# Altium PCB ver060.PcbDoc (part 1 of 2)
Units mm, origin at the board's own origin, x right, y up, seen from the top; angles counter-clockwise.
Board outline 100 x 49.5 mm, 4 copper layers (ASIG, GND1, GND2, PWR/DSIG), stack 1.569 mm thick; 117 components, 72 nets, 379 pads, 822 vias.
Unrouted connection lines stored in the file: 69.
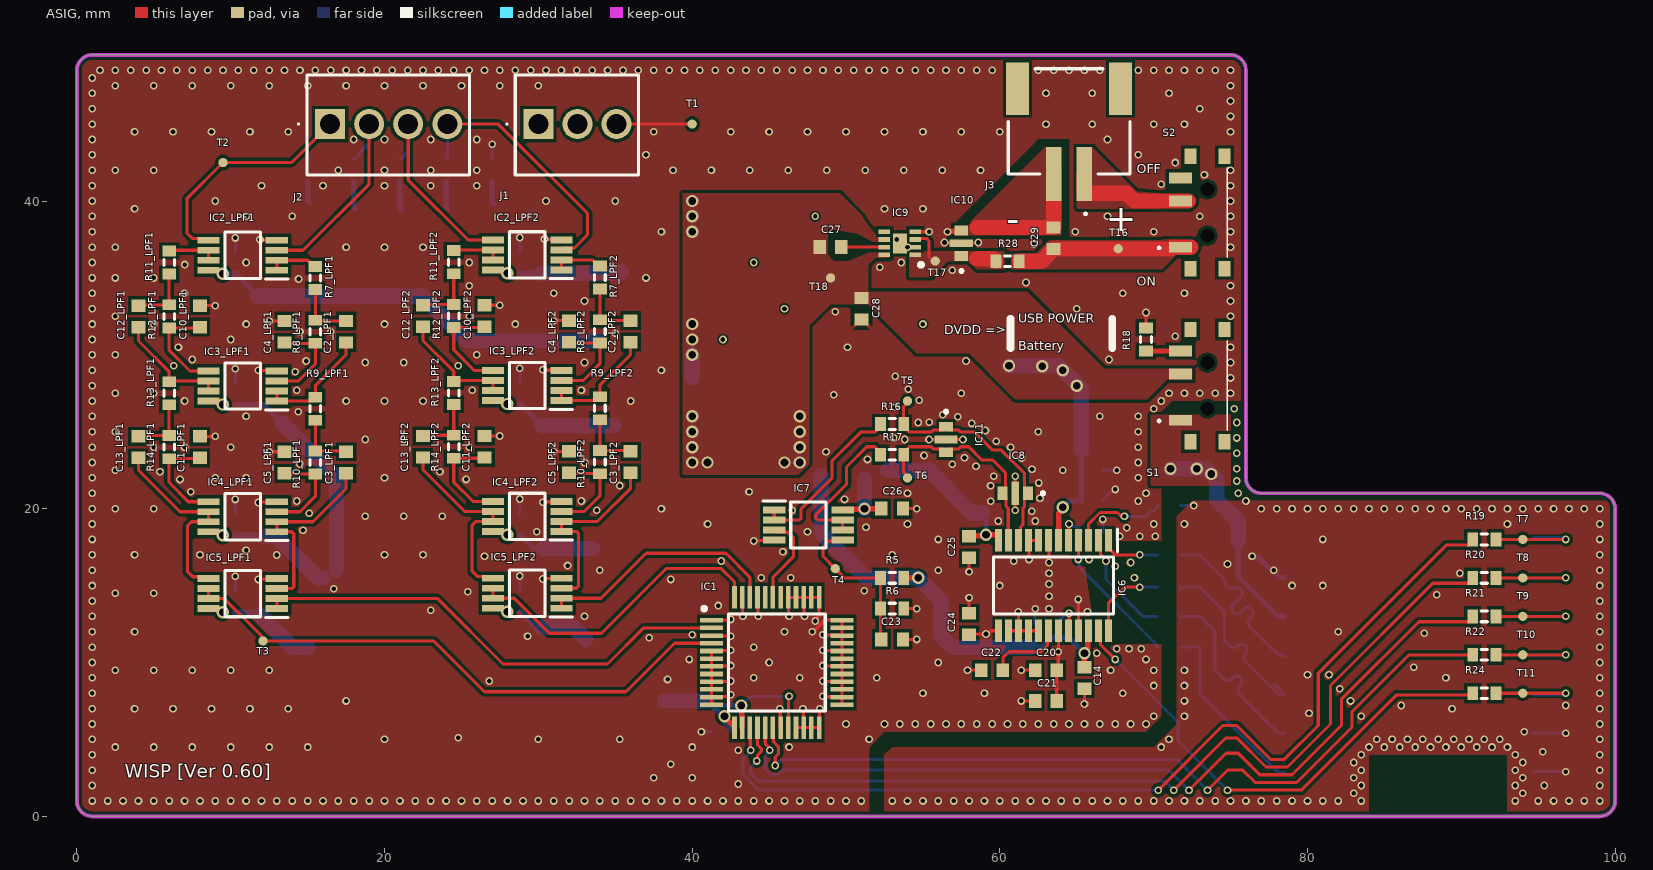
[diagram p0: ASIG view]
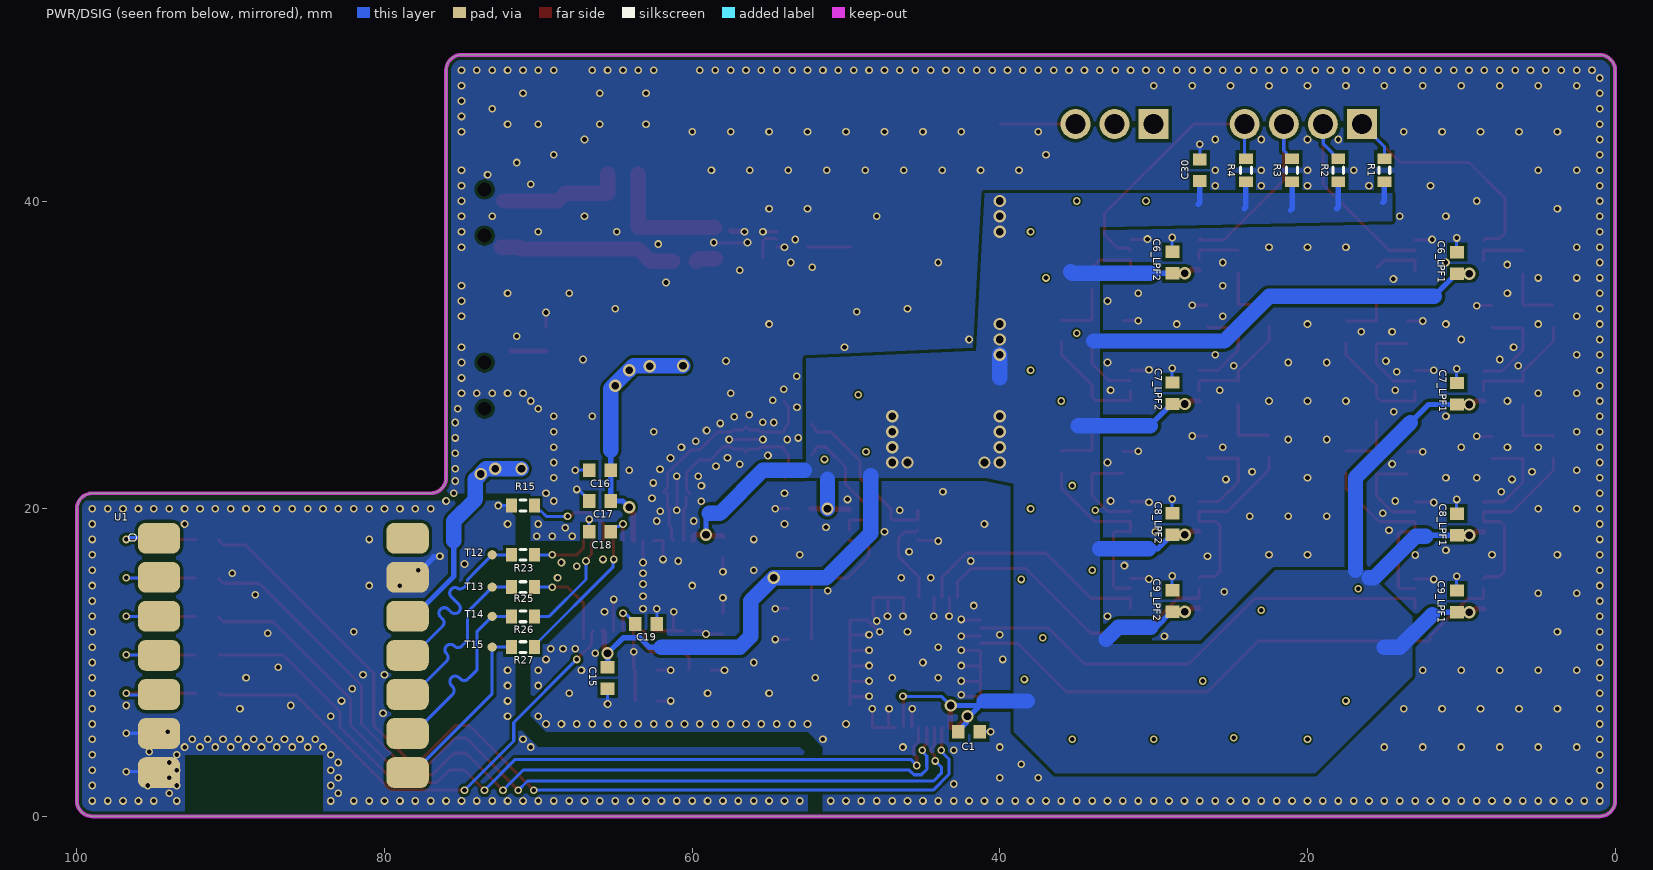
[diagram p1: PWR/DSIG view, seen from below]
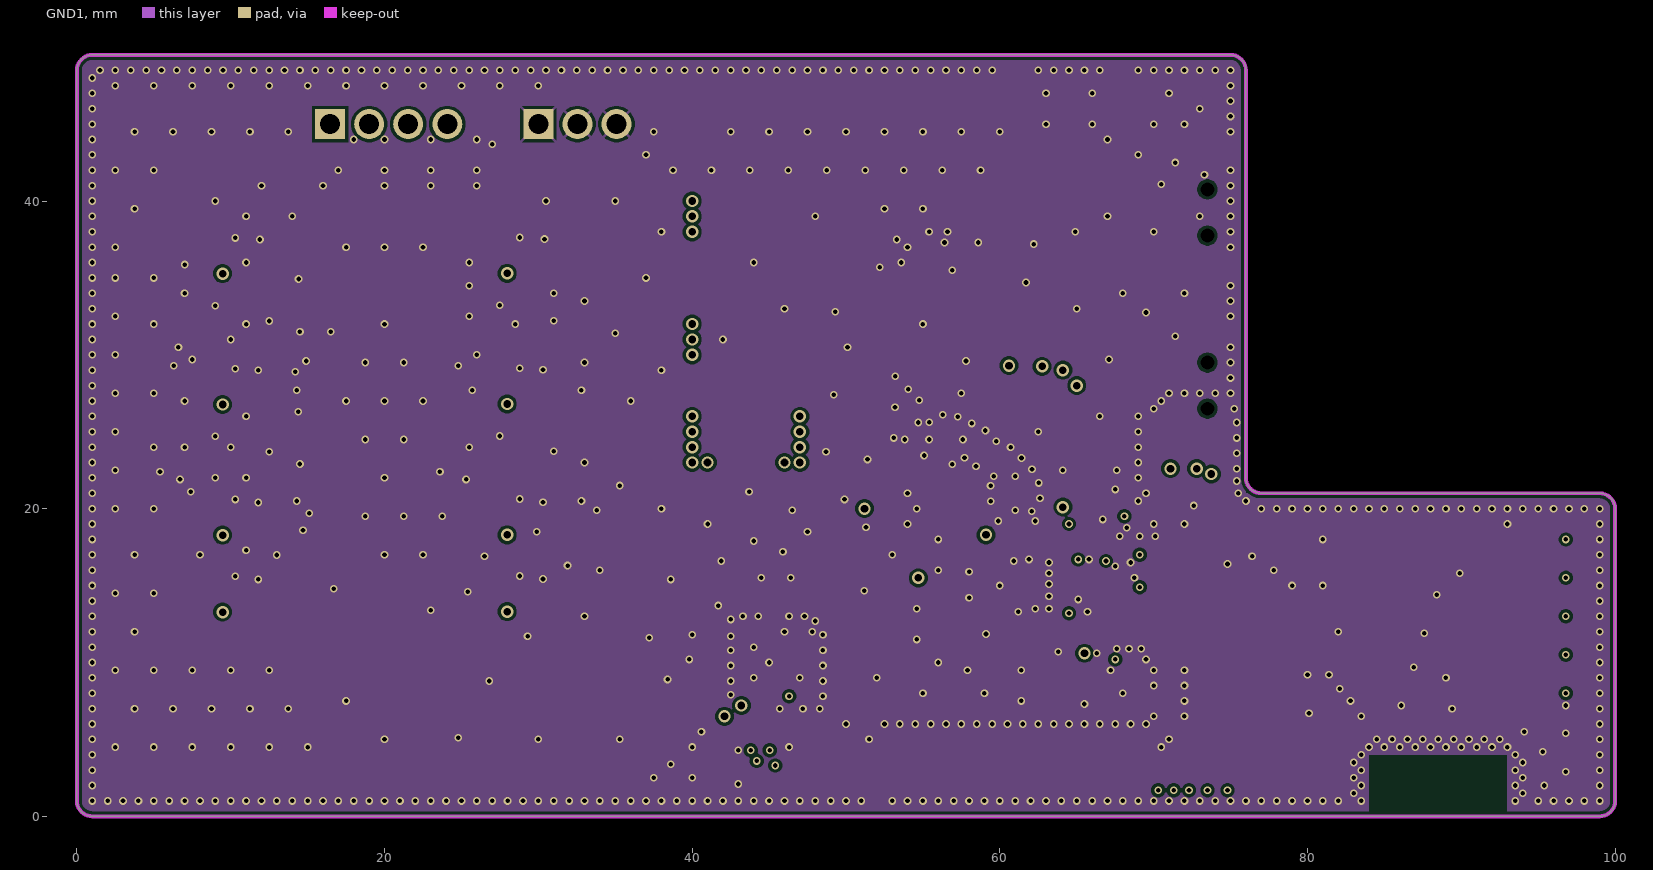
[diagram p2: GND1]
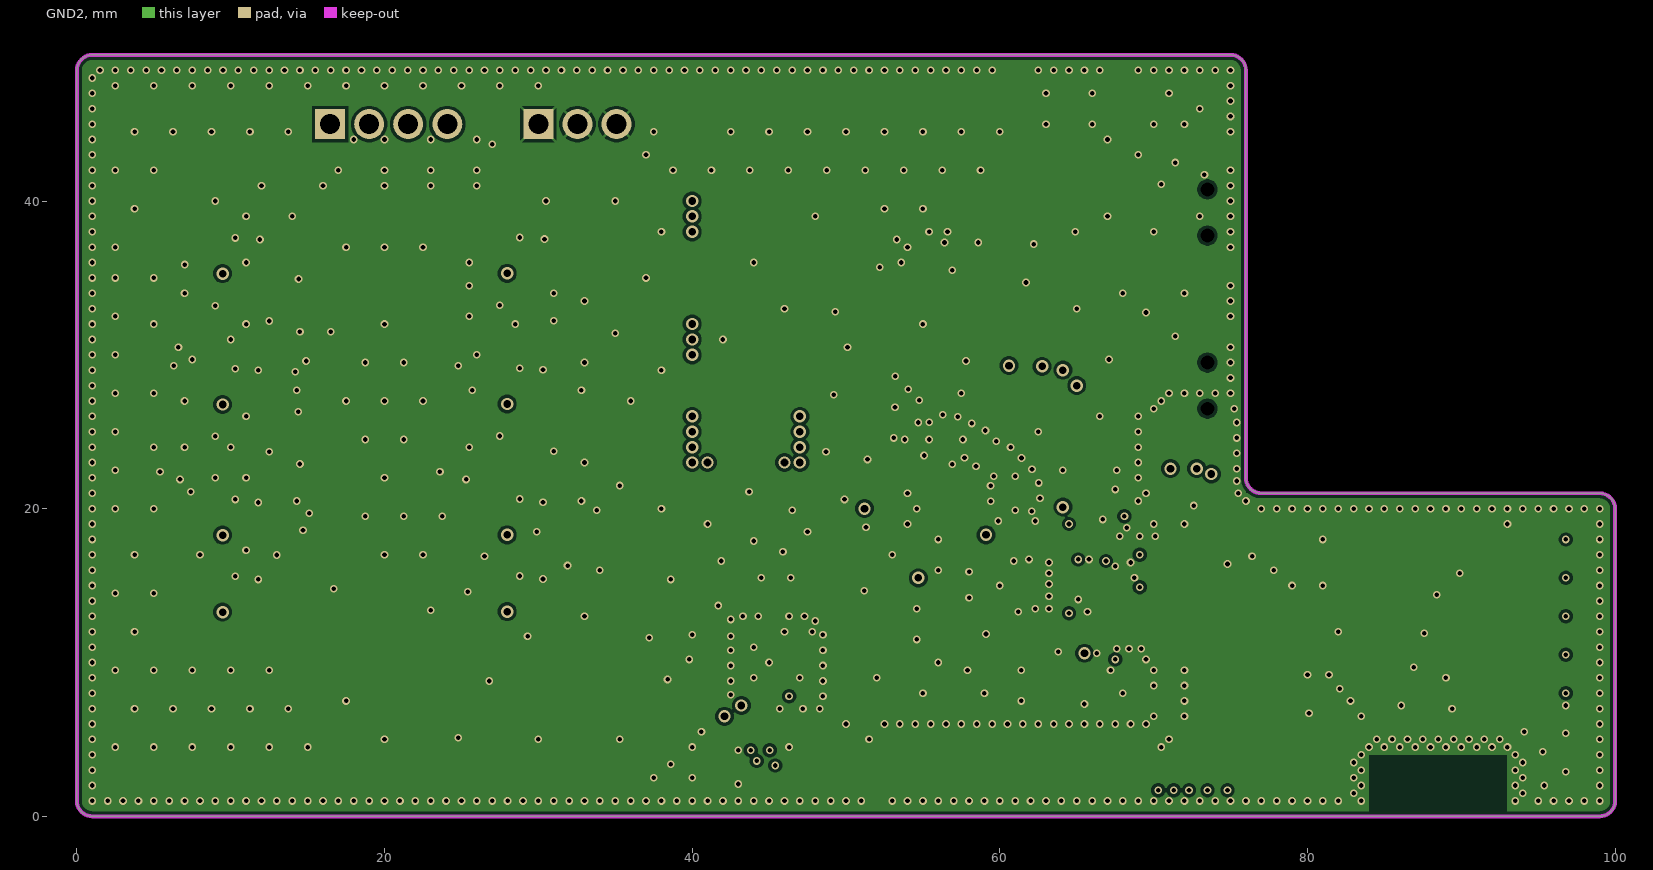
[diagram p3: GND2]

## Layer stack, top to bottom
Top Solder: solder mask 0.02, Solder Resist, Dk 3.8
ASIG: signal copper 0.035
Dielectric 2: prepreg 0.0994, JLC3313, Dk 4.05
GND1: signal copper 0.0175
Dielectric 1: dielectric 1.265, CORE, Dk 4.6
GND2: signal copper 0.0175
Dielectric 3: prepreg 0.0994, JLC3313, Dk 4.05
PWR/DSIG: signal copper 0.035
Bottom Solder: solder mask 0.02, Solder Resist, Dk 3.8

## Board outline
0,1 0,48.5 cw(c1,48.5) 1,49.5 75,49.5 cw(c75,48.5) 76,48.5 76,22 ccw(c77,22) 77,21 99,21 cw(c99,20) 100,20 100,1 cw(c99,1) 99,0 1,0 cw(c1,1)

## Design rules (kind name [scope] priority, off if disabled: settings)
Clearance Clearance_4 [InNamedPolygon('3V3_L01_P018')] p1: gap=0.254 ignorepadtopadclearanceinfootprint=TRUE except(0: Arc-Hole Track-Hole SMDPad-Hole THPad-Hole Via-Hole Fill-Hole Poly-Hole Region-Hole Text-Hole; 0.1: Arc-SMDPad Track-SMDPad SMDPad-SMDPad)
Clearance Clearance_3 [IsVia and InNet('GND')] p2: gap=0.1 ignorepadtopadclearanceinfootprint=TRUE except(0.01: Arc-Text Track-Text SMDPad-Text THPad-Text Via-Text Fill-Text Poly-Text Region-Text Text-Text)
Clearance Clearance_2 [OnLayer('PWR/DSIG') vs HasFootprint('SON50P200X200X80-9N-D')] p3: gap=0.1 ignorepadtopadclearanceinfootprint=TRUE
Clearance Clearance_1 [InNet('AVCC_3V3_raw')] p4: gap=0.2 ignorepadtopadclearanceinfootprint=TRUE except(0.5: Arc-Fill Arc-Poly Arc-Region Track-Fill Track-Poly Track-Region SMDPad-Fill SMDPad-Poly SMDPad-Region THPad-THPad THPad-Fill THPad-Poly THPad-Region Via-Via Via-Fill Via-Poly Via-Region Fill-Fill Fill-Poly Fill-Region Poly-Poly Poly-Region Region-Region)
Clearance [All] p5: gap=0.2 ignorepadtopadclearanceinfootprint=TRUE except(0.01: Arc-Text Track-Text SMDPad-Text THPad-Text Via-Text Fill-Text Poly-Text Region-Text Text-Text)
DiffPairsRouting [All] p1: maxlimit=2.5 minlimit=0.1 mostfreqgap=0.75 toplayer_minwidth=0.2 toplayer_maxwidth=0.5 toplayer_prefwidth=0.25 midlayer1_minwidth=0.2 midlayer1_maxwidth=0.5 midlayer1_prefwidth=0.25 midlayer2_minwidth=0.2 midlayer2_maxwidth=0.5 midlayer2_prefwidth=0.25 bottomlayer_minwidth=0.2 bottomlayer_maxwidth=0.5 bottomlayer_prefwidth=0.25 maxuncoupledlength=12.7
HoleSize [All] p1: absolutevalues=TRUE maxlimit=3.5 minlimit=0.3 maxpercent=80.000 minpercent=20.000
MinimumSolderMaskSliver [All] p1: minsoldermaskwidth=0.01
PlaneConnect [All] p1: planeconnectstyle=Direct reliefexpansion=0.5 reliefentries=4 reliefconductorwidth=0.35 reliefairgap=0.2
PolygonConnect PolygonConnect_8 [IsVia and InNet('GND') vs IsNamedPolygon('GND_L01_P025') or IsNamedPolygon('GND_L04_P026') or IsNamedPolygon('GND_L04_P027') or IsNamedPolygon('GND_L01_P024')] p1: connectstyle=Direct reliefconductorwidth=0.254 reliefentries=4 polygonreliefangle="90 Angle" airgapwidth=0.254
PolygonConnect PolygonConnect_7 [IsPad and InNet('GND') vs IsNamedPolygon('GND_L04_P026')] p2: thpad.connectstyle=Relief thpad.reliefconductorwidth=0.254 thpad.reliefentries=4 thpad.polygonreliefangle="90 Angle" thpad.airgapwidth=0.254 smdpad.connectstyle=Direct smdpad.reliefconductorwidth=0.254 smdpad.reliefentries=4 smdpad.polygonreliefangle="90 Angle" smdpad.airgapwidth=0.254 via.connectstyle=NoConnect via.reliefconductorwidth=0.254 via.reliefentries=4 via.polygonreliefangle="90 Angle" via.airgapwidth=0.254
PolygonConnect PolygonConnect_6 [InComponent('C28') vs InNet('GND')] p3: connectstyle=Relief reliefconductorwidth=0.254 reliefentries=4 polygonreliefangle="45 Angle" airgapwidth=0.254
PolygonConnect PolygonConnect_5 [All vs IsNamedPolygon('GND_L04_P027')] p4: connectstyle=NoConnect reliefconductorwidth=0.254 reliefentries=4 polygonreliefangle="45 Angle" airgapwidth=0.2
PolygonConnect PolygonConnect_4 [All vs IsNamedPolygon('GND_L01_P024') Or IsNamedPolygon('GND_L01_P025')] p5: connectstyle=NoConnect reliefconductorwidth=0.254 reliefentries=4 polygonreliefangle="45 Angle" airgapwidth=0.2
PolygonConnect PolygonConnect_3 [All vs IsNamedPolygon('3V3_L01_P014') Or IsNamedPolygon('3V3_L01_P015') Or IsNamedPolygon('GND_L01_P010') Or IsNamedPolygon('NETC29_1_L01_P011') Or IsNamedPolygon('NETIC9_1_L01_P009') Or IsNamedPolygon('NETIC9_1_L01_P012') Or IsNamedPolygon('NETJ3_1_L01_P008') Or IsNamedPolygon('3V3_L04_P013') Or IsNamedPolygon('NETS1_1_L01_P016')] p6: connectstyle=Direct reliefconductorwidth=0.254 reliefentries=4 polygonreliefangle="90 Angle" airgapwidth=0.254
PolygonConnect PolygonConnect_1 [isVia] p7: connectstyle=Direct reliefconductorwidth=0.254 reliefentries=4 polygonreliefangle="90 Angle" airgapwidth=0.254
PolygonConnect PolygonConnect_2 [InNet('3V3')] p8: connectstyle=Relief reliefconductorwidth=0.35 reliefentries=4 polygonreliefangle="45 Angle" airgapwidth=0.2
PolygonConnect [All] p9: connectstyle=Relief reliefconductorwidth=0.2 reliefentries=4 polygonreliefangle="45 Angle" airgapwidth=0.2
RoomDefinition LPF2 [InComponentClass('LPF2')] p1: confinementstyle=ConfineIn formatcopy=TRUE lockcomponents=FALSE outline 21.5,10.5 37,10.5 37,39 21.5,39
RoomDefinition LPF1 [InComponentClass('LPF1')] p2: confinementstyle=ConfineIn formatcopy=TRUE lockcomponents=FALSE outline 3,10.475 18.5,10.475 18.5,38.975 3,38.975
RoutingVias [All] p1: holewidth=0.3 width=0.5 viastyle="Through Hole" minholewidth=0.3 minwidth=0.5 maxholewidth=0.6 maxwidth=1
SilkToSilkClearance [All] p1: silktosilkclearance=0.01
SilkToSolderMaskClearance [IsPad] p1: minsilkscreentomaskgap=0.01 clearancetoexposedcopper=TRUE
SolderMaskExpansion SolderMaskExpansion_1 [IsVia] p1: expansion=0.01 istentingtop=TRUE
SolderMaskExpansion [All] p2: expansion=0.102 istentingtop=FALSE
Width Width_1 [InNet('AVCC_3V3')] p1: maxlimit=1 minlimit=0.2 preferedwidth=0.35
Width [All] p2: maxlimit=1 minlimit=0.2 preferedwidth=0.2
24 further rules are at their usual default settings.

## Classes and differential pairs
net class out_2[1..2]: out_21 out_22
net class out_1[1..2]: out_11 out_12
net class lpf_in_p2[1..2]: lpf_in_p21 lpf_in_p22
net class lpf_in_p1[1..2]: lpf_in_p11 lpf_in_p12
component class Signal_Analog: C1 C23 C30 IC1 J1 J2 R1 R2 R3 R4 R5 R6 T1 T2 T3 T4
component class Power: C27 C28 C29 IC9 IC10 J3 R28 S2 T16 T17 T18
component class "MCU (SPI_master)": R18 R19 R20 R21 R22 R23 R24 R25 R26 R27 S1 T7 T8 T9 T10 T11 T12 T13 T14 T15 U1
component class LPF2: C2_LPF2 C3_LPF2 C4_LPF2 C5_LPF2 C6_LPF2 C7_LPF2 C8_LPF2 C9_LPF2 C10_LPF2 C11_LPF2 C12_LPF2 C13_LPF2 IC2_LPF2 IC3_LPF2 IC4_LPF2 IC5_LPF2 R7_LPF2 R8_LPF2 R9_LPF2 R10_LPF2 R11_LPF2 R12_LPF2 R13_LPF2 R14_LPF2
component class LPF1: C2_LPF1 C3_LPF1 C4_LPF1 C5_LPF1 C6_LPF1 C7_LPF1 C8_LPF1 C9_LPF1 C10_LPF1 C11_LPF1 C12_LPF1 C13_LPF1 IC2_LPF1 IC3_LPF1 IC4_LPF1 IC5_LPF1 R7_LPF1 R8_LPF1 R9_LPF1 R10_LPF1 R11_LPF1 R12_LPF1 R13_LPF1 R14_LPF1
component class "ADC (SPI_slave)": C14 C15 C16 C17 C18 C19 C20 C21 C22 C24 C25 C26 IC6 IC7 IC8 IC11 R15 R16 R17 T5 T6
channel class ver060_LPF: LPF1 LPF2
differential pair Vin: +Vin_P -Vin_N
differential pair Vbuff: +Vbuff_P -Vbuff_N
differential pair Vbuff_1: +Vbuff_1_P -Vbuff_1_N

## Components (designator, comment, footprint, x,y, rotation, side; value= is the part's Value field where it differs from the comment)
C1 "Cap Semi" 1608[0603] 42,5.5 r0 bottom value=100nF
C2_LPF1 "Cap Semi" 1608[0603] 17.5,31.5 r270 top value=220nF (schematic designator C2)
C2_LPF2 "Cap Semi" 1608[0603] 36,31.525 r270 top value=220nF (schematic designator C2)
C3_LPF1 "Cap Semi" 1608[0603] 17.5,23 r270 top value=100nF (schematic designator C3)
C3_LPF2 "Cap Semi" 1608[0603] 36,23.025 r270 top value=100nF (schematic designator C3)
C4_LPF1 "Cap Semi" 1608[0603] 13.5,31.5 r270 top value=22nF (schematic designator C4)
C4_LPF2 "Cap Semi" 1608[0603] 32,31.525 r270 top value=22nF (schematic designator C4)
C5_LPF1 "Cap Semi" 1608[0603] 13.5,23 r270 top value=2.2nF (schematic designator C5)
C5_LPF2 "Cap Semi" 1608[0603] 32,23.025 r270 top value=2.2nF (schematic designator C5)
C6_LPF1 "Cap Semi" 1608[0603] 10.275,35.975 r270 bottom value=100nF (schematic designator C6)
C6_LPF2 "Cap Semi" 1608[0603] 28.775,36 r270 bottom value=100nF (schematic designator C6)
C7_LPF1 "Cap Semi" 1608[0603] 10.275,27.475 r270 bottom value=100nF (schematic designator C7)
C7_LPF2 "Cap Semi" 1608[0603] 28.775,27.5 r270 bottom value=100nF (schematic designator C7)
C8_LPF1 "Cap Semi" 1608[0603] 10.275,18.975 r270 bottom value=100nF (schematic designator C8)
C8_LPF2 "Cap Semi" 1608[0603] 28.775,19 r270 bottom value=100nF (schematic designator C8)
C9_LPF1 "Cap Semi" 1608[0603] 10.275,13.975 r270 bottom value=100nF (schematic designator C9)
C9_LPF2 "Cap Semi" 1608[0603] 28.775,14 r270 bottom value=100nF (schematic designator C9)
C10_LPF1 "Cap Semi" 1608[0603] 8,32.5 r270 top value=22nF (schematic designator C10)
C10_LPF2 "Cap Semi" 1608[0603] 26.5,32.525 r270 top value=22nF (schematic designator C10)
C11_LPF1 "Cap Semi" 1608[0603] 8,24 r270 top value=2.2nF (schematic designator C11)
C11_LPF2 "Cap Semi" 1608[0603] 26.5,24.025 r270 top value=2.2nF (schematic designator C11)
C12_LPF1 "Cap Semi" 1608[0603] 4,32.5 r270 top value=220nF (schematic designator C12)
C12_LPF2 "Cap Semi" 1608[0603] 22.5,32.525 r270 top value=220nF (schematic designator C12)
C13_LPF1 "Cap Semi" 1608[0603] 4,24 r270 top value=100nF (schematic designator C13)
C13_LPF2 "Cap Semi" 1608[0603] 22.5,24.025 r270 top value=100nF (schematic designator C13)
C14 "Cap Semi" 1608[0603] 65.5,9 r270 top value=100nF
C15 "Cap Semi" 1608[0603] 65.5,9 r270 bottom value=1uF
C16 "Cap Semi" 1608[0603] 66,22.5 r0 bottom value=1uF
C17 "Cap Semi" 1608[0603] 66,20.5 r0 bottom value=100nF
C18 "Cap Semi" 1608[0603] 66,18.5 r0 bottom value=100nF
C19 "Cap Semi" 1608[0603] 63,12.5 r180 bottom value=100nF
C20 "Cap Semi" 1608[0603] 63,9.5 r0 top value=100nF
C21 "Cap Semi" 1608[0603] 63,7.5 r0 top value=1uF
C22 "Cap Semi" 1608[0603] 59.5,9.5 r180 top value=100nF
C23 "Cap Semi" 1608[0603] 53,11.5 r180 top value=1uF
C24 "Cap Semi" 1608[0603] 58,12.5 r90 top value=100nF
C25 "Cap Semi" 1608[0603] 58,17.5 r270 top value=100nF
C26 "Cap Semi" 1608[0603] 53,20 r0 top value=100nF
C27 "Cap Semi" 1608[0603] 49,37 r0 top value=10nF
C28 "Cap Semi" 1608[0603] 51,33 r270 top value=4.7uF
C29 "Cap Semi" 1608[0603] 63.5,37.58 r90 top value=4.7uF
C30 "Cap Semi" 1608[0603] 27,42 r270 bottom value=1uF
IC1 "ADG726BSUZ" QFP50P900X900X120-48N 45.5,10 r0 top
IC2_LPF1 "ADA4051-2ARMZ" SOP65P490X110-8N 10.775,36.475 r180 top (schematic designator IC2)
IC2_LPF2 "ADA4051-2ARMZ" SOP65P490X110-8N 29.275,36.5 r180 top (schematic designator IC2)
IC3_LPF1 "ADA4051-2ARMZ" SOP65P490X110-8N 10.775,27.975 r180 top (schematic designator IC3)
IC3_LPF2 "ADA4051-2ARMZ" SOP65P490X110-8N 29.275,28 r180 top (schematic designator IC3)
IC4_LPF1 "ADA4051-2ARMZ" SOP65P490X110-8N 10.775,19.475 r180 top (schematic designator IC4)
IC4_LPF2 "ADA4051-2ARMZ" SOP65P490X110-8N 29.275,19.5 r180 top (schematic designator IC4)
IC5_LPF1 "ADA4051-2ARMZ" SOP65P490X110-8N 10.775,14.475 r180 top (schematic designator IC5)
IC5_LPF2 "ADA4051-2ARMZ" SOP65P490X110-8N 29.275,14.5 r180 top (schematic designator IC5)
IC6 "AD7124-4TRUZ-EP" SOP65P640X120-24N 63.5,15 r270 top
IC7 "ADA4051-2ARMZ" SOP65P490X110-8N 47.561,18.939 r0 top
IC8 "X2Y Cap 100nF" 500X14W102MV4T 61,21 r180 top
IC9 "MAX38902AATA+T" SON50P200X200X80-9N-D 53.5,37.25 r180 top
IC10 "X2Y Cap 10pF" 500X14W102MV4T 57.5,37.25 r90 top
IC11 "X2Y Cap 10pF" 500X14W102MV4T 56.5,24.5 r270 top
J1 "VN03A1500000G" VN03A1500000G 30,45 r0 top
J2 "VN04A1500000G" VN04A1500000G 16.46,45 r0 top
J3 "1769" 1769 64.5,41.75 r180 top
R1 "Res3" J1-0603 15,42 r90 bottom value=51K
R2 "Res3" J1-0603 18,42 r90 bottom value=51K
R3 "Res3" J1-0603 21,42 r90 bottom value=51K
R4 "Res3" J1-0603 24,42 r90 bottom value=51K
R5 "Res3" J1-0603 53,15.5 r0 top value=51K
R6 "Res3" J1-0603 53,13.5 r180 top value=51K
R7_LPF1 "Res3" J1-0603 15.5,35 r90 top value=68K (schematic designator R7)
R7_LPF2 "Res3" J1-0603 34,35.025 r90 top value=68K (schematic designator R7)
R8_LPF1 "Res3" J1-0603 15.5,31.5 r90 top value=1M (schematic designator R8)
R8_LPF2 "Res3" J1-0603 34,31.525 r90 top value=1M (schematic designator R8)
R9_LPF1 "Res3" J1-0603 15.5,26.5 r90 top value=680K (schematic designator R9)
R9_LPF2 "Res3" J1-0603 34,26.525 r90 top value=680K (schematic designator R9)
R10_LPF1 "Res3" J1-0603 15.5,23 r90 top value=680K (schematic designator R10)
R10_LPF2 "Res3" J1-0603 34,23.025 r90 top value=680K (schematic designator R10)
R11_LPF1 "Res3" J1-0603 6,36 r90 top value=68K (schematic designator R11)
R11_LPF2 "Res3" J1-0603 24.5,36.025 r90 top value=68K (schematic designator R11)
R12_LPF1 "Res3" J1-0603 6,32.5 r90 top value=1M (schematic designator R12)
R12_LPF2 "Res3" J1-0603 24.5,32.525 r90 top value=1M (schematic designator R12)
R13_LPF1 "Res3" J1-0603 6,27.5 r90 top value=680K (schematic designator R13)
R13_LPF2 "Res3" J1-0603 24.5,27.525 r90 top value=680K (schematic designator R13)
R14_LPF1 "Res3" J1-0603 6,24 r90 top value=680K (schematic designator R14)
R14_LPF2 "Res3" J1-0603 24.5,24.025 r90 top value=680K (schematic designator R14)
R15 "Res3" J1-0603 71,20.2 r0 bottom value=10K
R16 "Res3" J1-0603 53,25.5 r180 top value=0R
R17 "Res3" J1-0603 53,23.5 r180 top value=0R
R18 "Res3" J1-0603 69.5,31 r90 top value=10K
R19 "Res3" J1-0603 91.5,18 r180 top value=0R
R20 "Res3" J1-0603 91.5,15.5 r180 top value=0R
R21 "Res3" J1-0603 91.5,13 r180 top value=0R
R22 "Res3" J1-0603 91.5,10.5 r180 top value=0R
R23 "Res3" J1-0603 71,17 r0 bottom value=0R
R24 "Res3" J1-0603 91.5,8 r180 top value=0R
R25 "Res3" J1-0603 71,14.9 r0 bottom value=0R
R26 "Res3" J1-0603 71,13 r0 bottom value=0R
R27 "Res3" J1-0603 71,11 r0 bottom value=0R
R28 "Res3" J1-0603 60.5,36.08 r0 top value=0R
S1 "PCM12SMTR" PCM12SMTR 73.5,28 r90 top
S2 "PCM12SMTR" PCM12SMTR 73.5,39.25 r90 top
T1 "TP_SMT" TP_SMT_Round_0.6x0.6 40,45 r0 top
T2 "TP_SMT" TP_SMT_Round_0.6x0.6 9.5,42.5 r0 top
T3 "TP_SMT" TP_SMT_Round_0.6x0.6 12.1,11.4 r0 top
T4 "TP_SMT" TP_SMT_Round_0.6x0.6 49.3,16.1 r0 top
T5 "TP_SMT" TP_SMT_Round_0.6x0.6 54,27 r0 top
T6 "TP_SMT" TP_SMT_Round_0.6x0.6 54,22 r0 top
T7 "TP_SMT" TP_SMT_Round_0.6x0.6 94,18 r270 top
T8 "TP_SMT" TP_SMT_Round_0.6x0.6 94,15.5 r270 top
T9 "TP_SMT" TP_SMT_Round_0.6x0.6 94,13 r270 top
T10 "TP_SMT" TP_SMT_Round_0.6x0.6 94,10.5 r0 top
T11 "TP_SMT" TP_SMT_Round_0.6x0.6 94,8 r0 top
T12 "TP_SMT" TP_SMT_Round_0.6x0.6 73,17 r180 bottom
T13 "TP_SMT" TP_SMT_Round_0.6x0.6 73,14.9 r180 bottom
T14 "TP_SMT" TP_SMT_Round_0.6x0.6 73,13 r180 bottom
T15 "TP_SMT" TP_SMT_Round_0.6x0.6 73,11 r180 bottom
T16 "TP_SMT" TP_SMT_Round_0.6x0.6 67.7,36.9 r90 top
T17 "TP_SMT" TP_SMT_Round_0.6x0.6 55.8,36.1 r90 top
T18 "TP_SMT" TP_SMT_Round_0.6x0.6 49,35 r90 top
U1 "MOUDLE-SEEEDUINO-XIAO-NRF52840-SMD" MOUDLE16P-SMD-2-54-21X17-8MM 95.5,-0.04 r180 bottom

## Footprints (in the part's own frame and the unit in brackets; to place one, negate y for a bottom-side part, rotate by r counter-clockwise, add the part's x,y. Pads: shape width x height; smd on the part's side, far side on the other; paste and mask are expansions set on the pad)
500X14W102MV4T [mm]
  rect 0.64x0.89 smd: A1(-0.83,0) B1(0.83,0)
  rect 0.51x1.52 smd: G1(0,0)
  silkscreen extent -1.9,-0.1 -1.7,0.1
1608[0603] [mm] "Chip Capacitor, Body 1.6x0.8mm, IPC High Density"
  rect 0.8x0.9 smd: 1(-0.7,0) 2(0.7,0)
  body extent -0.87,-0.48 0.87,0.48, height 1.3
1769 [mm]
  rect 1x3.5 smd: 1(-1,0) 2(1,0)
  rect 1.5x3.4 smd: 3(-3.35,-5.55) 4(3.35,-5.55)
  silkscreen extent -3.95,-6.85 3.95,2.63, body extent -3.95,-7.07 3.95,1.53, height 4.8
J1-0603 [mm] "Chip Resistor, Body 1.6x0.8mm, IPC High Density"
  rect 0.7x0.9 smd: 1(-0.75,0) 2(0.75,0)
  silkscreen extent -0.2,-0.35 0.2,0.35, body extent -0.85,-0.48 0.85,0.48, height 0.9
MOUDLE16P-SMD-2-54-21X17-8MM [mm]
  rrect50% 2.75x2 smd: 1(0.835,18.12) 2(0.835,15.58) 3(0.835,13.04) 4(0.835,10.5) 5(0.835,7.96) 6(0.835,5.42) 7(0.835,2.88) 8(17,2.88) 9(17,5.42) 10(17,7.96) 11(17,10.5) 12(17,13.04) 13(17,15.58) 14(17,18.12)
  silkscreen extent -1.14,17.91 -0.64,18.41
PCM12SMTR [mm]
  rect 0.7x1.5 smd: 1(-2.25,1.75) 2(0.75,1.75) 3(2.25,1.75)
  round 0.45 hole 0.9 unplated: MH1(-1.5,0) MH2(1.5,0)
  rect 1x0.8 smd: MP1(-3.65,1.1) MP2(-3.65,-1.1) MP3(3.65,-1.1) MP4(3.65,1.1)
  silkscreen extent -2.9,-1.3 2.9,3.2, body extent -3.85,-2.84 3.85,2.16, height 1.41
QFP50P900X900X120-48N [mm]
  rect 1.475x0.3 smd: 1(-4.238,2.75) 2(-4.238,2.25) 3(-4.238,1.75) 4(-4.238,1.25) 5(-4.238,0.75) 6(-4.238,0.25) 7(-4.238,-0.25) 8(-4.238,-0.75) 9(-4.238,-1.25) 10(-4.238,-1.75) 11(-4.238,-2.25) 12(-4.238,-2.75) 25(4.238,-2.75) 26(4.238,-2.25) 27(4.238,-1.75) 28(4.238,-1.25) 29(4.238,-0.75) 30(4.238,-0.25) 31(4.238,0.25) 32(4.238,0.75) 33(4.238,1.25) 34(4.238,1.75) 35(4.238,2.25) 36(4.238,2.75)
  rect 0.3x1.475 smd: 13(-2.75,-4.238) 14(-2.25,-4.238) 15(-1.75,-4.238) 16(-1.25,-4.238) 17(-0.75,-4.238) 18(-0.25,-4.238) 19(0.25,-4.238) 20(0.75,-4.238) 21(1.25,-4.238) 22(1.75,-4.238) 23(2.25,-4.238) 24(2.75,-4.238) 37(2.75,4.238) 38(2.25,4.238) 39(1.75,4.238) 40(1.25,4.238) 41(0.75,4.238) 42(0.25,4.238) 43(-0.25,4.238) 44(-0.75,4.238) 45(-1.25,4.238) 46(-1.75,4.238) 47(-2.25,4.238) 48(-2.75,4.238)
  silkscreen extent -4.85,-3.15 3.15,3.62, body extent -4.5,-4.5 4.5,4.5, height 1.2
SON50P200X200X80-9N-D [mm]
  rect 0.75x0.3 smd: 1(-1,0.75) 2(-1,0.25) 3(-1,-0.25) 4(-1,-0.75) 5(1,-0.75) 6(1,-0.25) 7(1,0.25) 8(1,0.75)
  rect 0.9x1.3 smd: 9(0,0)
  silkscreen extent -1.5,1.28 -1.25,1.52, body extent -1.05,-1 1.05,1, height 0.8
SOP65P490X110-8N [mm]
  rect 1.45x0.45 smd: 1(-2.225,0.975) 2(-2.225,0.325) 3(-2.225,-0.325) 4(-2.225,-0.975) 5(2.225,-0.975) 6(2.225,-0.325) 7(2.225,0.325) 8(2.225,0.975)
  silkscreen extent -2.95,-1.5 1.15,1.55, body extent -2.45,-1.5 2.45,1.5, height 1.1
SOP65P640X120-24N [mm]
  rect 1.475x0.45 smd: 1(-2.938,3.575) 2(-2.938,2.925) 3(-2.938,2.275) 4(-2.938,1.625) 5(-2.938,0.975) 6(-2.938,0.325) 7(-2.938,-0.325) 8(-2.938,-0.975) 9(-2.938,-1.625) 10(-2.938,-2.275) 11(-2.938,-2.925) 12(-2.938,-3.575) 13(2.938,-3.575) 14(2.938,-2.925) 15(2.938,-2.275) 16(2.938,-1.625) 17(2.938,-0.975) 18(2.938,-0.325) 19(2.938,0.325) 20(2.938,0.975) 21(2.938,1.625) 22(2.938,2.275) 23(2.938,2.925) 24(2.938,3.575)
  silkscreen extent -3.67,-3.9 1.85,4.15, body extent -3.2,-3.9 3.2,3.9, height 1.2
TP_SMT_Round_0.6x0.6 [mm]
  round 0.6 smd: 1(0,0)
VN03A1500000G [mm]
  rect 1.95x1.95 hole 1.3: 1(0,0)
  round 1.95 hole 1.3: 2(2.54,0) 3(5.08,0)
  silkscreen extent -2.1,-3.3 6.52,3.2, body extent -1.5,-3.3 6.52,3.2, height 8.9
VN04A1500000G [mm]
  rect 1.95x1.95 hole 1.3: 1(0,0)
  round 1.95 hole 1.3: 2(2.54,0) 3(5.08,0) 4(7.62,0)
  silkscreen extent -2.1,-3.3 9.06,3.2, body extent -1.5,-3.3 9.06,3.2, height 8.6

## Part data
C1 C2_LPF1 C2_LPF2 C3_LPF1 C3_LPF2 C4_LPF1 C4_LPF2 C5_LPF1 C5_LPF2 C6_LPF1 C6_LPF2 C7_LPF1 C7_LPF2 C8_LPF1 C8_LPF2 C9_LPF1 C9_LPF2 C10_LPF1 C10_LPF2 C11_LPF1 C11_LPF2 C12_LPF1 C12_LPF2 C13_LPF1 C13_LPF2 C14 C15 C16 C17 C18 C19 C20 C21 C22 C23 C24 C25 C26 C27 C28 C29 C30: "Capacitor (Semiconductor SIM Model)", LatestRevisionDate=29-May-2009, LatestRevisionNote="IPC-7351 Footprint Added.", PackageDescription="Chip Capacitor", PackageReference=C1206, Published=8-Jun-2000, Publisher="Altium Limited"
IC1: "Integrated Circuit", Manufacturer_Name="Analog Devices", Mouser Part Number=584-ADG726BSUZ, Arrow Part Number=ADG726BSUZ, Arrow Price/Stock=https://www.arrow.com/en/products/adg726bsuz/analog-devices?region=nac, Datasheet Link=https://www.analog.com/media/en/technical-documentation/data-sheets/ADG726_732.pdf, Height=1.2mm, Manufacturer_Part_Number=ADG726BSUZ, Mouser Price/Stock=https://www.mouser.co.uk/ProductDetail/Analog-Devices/ADG726BSUZ?qs=BpaRKvA4VqHCQkaid0DsDg%3D%3D
IC2_LPF1 IC2_LPF2 IC3_LPF1 IC3_LPF2 IC4_LPF1 IC4_LPF2 IC5_LPF1 IC5_LPF2 IC7: "Integrated Circuit", Manufacturer_Name="Analog Devices", Mouser Part Number=584-ADA4051-2ARMZ, Arrow Part Number=ADA4051-2ARMZ, Arrow Price/Stock=https://www.arrow.com/en/products/ada4051-2armz/analog-devices?region=europe, Datasheet Link=https://www.analog.com/media/en/technical-documentation/data-sheets/ADA4051-1_4051-2.pdf, Height=1.1mm, Manufacturer_Part_Number=ADA4051-2ARMZ, Mouser Price/Stock=https://www.mouser.co.uk/ProductDetail/Analog-Devices/ADA4051-2ARMZ?qs=BpaRKvA4VqGG1fnokDYZmQ%3D%3D
IC6: "Integrated Circuit", Manufacturer_Name="Analog Devices", Mouser Part Number=584-AD7124-4TRUZ-EP, Arrow Part Number=AD7124-4TRUZ-EP, Arrow Price/Stock=https://www.arrow.com/en/products/ad7124-4truz-ep/analog-devices?region=nac, Datasheet Link=https://www.arrow.com/en/products/ad7124-4truz-ep/analog-devices?region=nac, Height=1.2mm, Manufacturer_Part_Number=AD7124-4TRUZ-EP, Mouser Price/Stock=https://www.mouser.co.uk/ProductDetail/Analog-Devices/AD7124-4TRUZ-EP?qs=PzGy0jfpSMv6df%252BLlDr47w%3D%3D
IC8 IC10 IC11: library part 500X14W102MV4T, "Integrated Circuit", Manufacturer_Name="JOHANSON TECHNOLOGY", Mouser Part Number=605-500X14W102MV4T, Datasheet Link=https://www.johansondielectrics.com/downloads/x2y-filter-and-decoupling-capacitors.pdf, Height=0.66mm, Manufacturer_Part_Number=500X14W102MV4T, Mouser Price/Stock=https://www.mouser.co.uk/ProductDetail/Johanson-Dielectrics/500X14W102MV4T?qs=yCnrNFeXz%252Bg%252BGvc939b0KQ%3D%3D
IC9: "Integrated Circuit", Manufacturer_Name="Analog Devices", Mouser Part Number=700-MAX38902AATA+T, Datasheet Link=https://media.digikey.com/pdf/Data%20Sheets/Maxim%20PDFs/MAX38902A_B_C_D_Rev4_12-6-18.pdf, Height=0.8mm, Manufacturer_Part_Number=MAX38902AATA+T, Mouser Price/Stock=https://www.mouser.co.uk/ProductDetail/Maxim-Integrated/MAX38902AATA%2bT?qs=rrS6PyfT74ceu65lHXtPmw%3D%3D
J1: "Connector", Manufacturer_Name=Amphenol, Mouser Part Number=649-VN03A15000J0G, Datasheet Link=https://eu.mouser.com/datasheet/2/18/9COuFx9FNOAv-1379191.pdf, Height=8.8mm, Manufacturer_Part_Number=VN03A1500000G, Mouser Price/Stock=https://www.mouser.co.uk/ProductDetail/Amphenol-Anytek/VN03A1500000G?qs=Mv7BduZupUh59KeTY610Jg%3D%3D
J2: "Connector", Manufacturer_Name=Amphenol, Mouser Part Number=649-VN04A15000J0G, Datasheet Link=https://eu.mouser.com/datasheet/2/18/9COuFx9FNOAv-1379191.pdf, Height=8.5mm, Manufacturer_Part_Number=VN04A1500000G, Mouser Price/Stock=https://www.mouser.co.uk/ProductDetail/Amphenol-Anytek/VN04A1500000G?qs=Mv7BduZupUg1gSttWAc7xA%3D%3D
J3: "Connector", Manufacturer_Name=Adafruit, Mouser Part Number=485-1769, Arrow Part Number=1769, Arrow Price/Stock=https://www.arrow.com/en/products/1769/adafruit-industries?region=nac, Datasheet Link=https://cdn-shop.adafruit.com/datasheets/17311.pdf, Manufacturer_Part_Number=1769, Mouser Price/Stock=https://www.mouser.co.uk/ProductDetail/Adafruit/1769?qs=GURawfaeGuBbgoGtf2XstA%3D%3D
R1 R2 R3 R4 R5 R6 R7_LPF1 R7_LPF2 R8_LPF1 R8_LPF2 R9_LPF1 R9_LPF2 R10_LPF1 R10_LPF2 R11_LPF1 R11_LPF2 R12_LPF1 R12_LPF2 R13_LPF1 R13_LPF2 R14_LPF1 R14_LPF2 R15 R16 R17 R18 R19 R20 R21 R22 R23 R24 R25 R26 R27 R28: "Resistor", LatestRevisionDate=29-May-2009, LatestRevisionNote="IPC-7351 Footprint Added.", PackageDescription="Chip Resistor", PackageReference=J1-0603, Published=8-Jun-2000, Publisher="Altium Limited"
S1 S2: "Switch", Manufacturer_Name="C & K COMPONENTS", Mouser Part Number=611-PCM12SMTR, Arrow Part Number=PCM12SMTR, Arrow Price/Stock=https://www.arrow.com/en/products/pcm12smtr/ck?region=nac, Datasheet Link=https://www.ckswitches.com/media/1424/pcm.pdf, Height=1.4mm, Manufacturer_Part_Number=PCM12SMTR, Mouser Price/Stock=https://www.mouser.co.uk/ProductDetail/CK/PCM12SMTR?qs=mfFuHy8STfL3qrPSfCHA7w%3D%3D
U1: Package=MOUDLE16P-SMD-2.54-21X17.8MM, DeviceName=-SMD, DeviceSetName=MOUDLE-SEEEDUINO-XIAO-NRF52840, GateName_1=G$1, LibraryName=Seeed-Studio-XIAO-nRF52840-footprint-eagle, SymbolName_1=MOUDLE-SEEEDUINO-XIAO-NRF52840

## Via types
v1: diameter 0.5, hole 0.3, ASIG to PWR/DSIG, tented both sides, 784 vias
v2: diameter 0.8, hole 0.5, ASIG to PWR/DSIG, tented both sides, 30 vias
v3: diameter 0.8, hole 0.5, ASIG to PWR/DSIG, 8 vias

## Nets (pads, with @x,y where several pads share a name; then routed paths per layer and width w, separated by ;. In a path a pad name is that pad's centre, name@x,y a point inside that pad or via, vN(x,y) a via of type N, cw(c..) or ccw(c..) an arc to the next point about the centre after c; other vN are vias at no path point)
3V3: C1.2 C6_LPF1.2 C6_LPF2.2 C7_LPF1.2 C7_LPF2.2 C8_LPF1.2 C8_LPF2.2 C9_LPF1.2 C9_LPF2.2 C14.1 C15.1 C16.1 C17.1 C25.1 C26.1 C27.1 C28.1 C30.2 IC1.13 IC1.14 IC1.20 IC2_LPF1.8 IC2_LPF2.8 IC3_LPF1.8 IC3_LPF2.8 IC4_LPF1.8 IC4_LPF2.8 IC5_LPF1.8 IC5_LPF2.8 IC6.6 IC6.12 IC6.22 IC7.8 IC9.6 IC9.8 R1.1 R2.1 R3.1 R4.1 R5.2 S1.2 T18.1 | length 170.8
  ASIG w0.2: v2(43.2,7.2) v2@43.225,7.175 ; IC1.14@43.225,5.787 IC1.14@43.25,5.762 ; IC1.20@46.25,5.762 46.275,5.787 46.275,7.775 v1(46.3,7.8)
  ASIG w0.35: IC5_LPF1.8@8.55,13.5 9.05,13.5 9.189,13.361 9.389,13.361 v3(9.475,13.275) ; IC4_LPF1.8@8.55,18.5 9.05,18.5 9.189,18.361 9.389,18.361 v3(9.475,18.275) ; IC3_LPF1.8@8.55,27 9.05,27 9.189,26.861 9.389,26.861 v3(9.475,26.775) ; IC5_LPF2.8@27.05,13.525 27.55,13.525 27.689,13.386 27.889,13.386 v3(27.975,13.3) ; IC4_LPF2.8@27.05,18.525 27.55,18.525 27.689,18.386 27.889,18.386 v3(27.975,18.3) ; IC3_LPF2.8@27.05,27.025 27.55,27.025 27.689,26.886 27.889,26.886 v3(27.975,26.8) ; IC2_LPF2.8@27.05,35.525 27.55,35.525 27.689,35.386 27.889,35.386 v3(27.975,35.3) ; v2(42.1,6.5) 42.1,6.47 42.75,5.82 IC1.13@42.75,5.762 ; IC1.14@43.225,5.787 v2@43.225,7.175 ; IC7.8@49.786,19.914 49.828,19.957 51.157,19.957 v2(51.2,20) C26.1@52.3,20 ; R5.2@53.75,15.5 v2(54.7,15.5) ; C25.1@58,18.2 58.05,18.25 59.05,18.25 v2(59.1,18.3) 59.875,18.3 59.925,18.25 IC6.12@59.925,17.938 ; IC6.6@63.825,17.938 63.825,19.703 64.1,19.978 v2(64.1,20.1) ; C14.1@65.5,9.7 v2(65.5,10.6) 65.5,10.722 65.725,10.947 65.725,12.012 IC6.22@65.775,12.062
  PWR/DSIG w0.2: 41,7.5 41.3,7.2 ; v2(43.2,7.2) 43.8,7.8 v1(46.3,7.8)
  PWR/DSIG w0.35: v3(9.475,35.275) C6_LPF1.2@10.275,35.275 10.325,35.275 11.75,33.85 11.75,33.8 ; C9_LPF1.2@10.275,13.275 11.725,13.275 11.9,13.1 ; C8_LPF1.2@10.275,18.275 12.225,18.275 ; C7_LPF1.2@10.275,26.775 12.125,26.775 13.3,25.6 ; R1.1@15,41.25 15,40 15.1,39.9 ; R2.1@18,41.25 18,39.6 18.1,39.5 ; R3.1@21,41.25 21,39.5 21.1,39.4 ; R4.1@24,41.25 24,39.6 24.1,39.5 ; C30.2@27,41.3 27,39.9 27.1,39.8 ; C9_LPF2.2@28.775,13.3 28.825,13.3 29.825,12.3 30.2,12.3 ; C8_LPF2.2@28.775,18.3 28.825,18.3 29.725,17.4 30.3,17.4 ; C7_LPF2.2@28.775,26.8 28.825,26.8 30.225,25.4 ; C6_LPF2.2@28.775,35.3 30.2,35.3 ; v2(42.1,6.5) 42,6.5 41.3,7.2 v2(43.2,7.2) ; 42.186,6.064 42.7,5.55 C1.2@42.7,5.5 ; 58.9,19.7 59.1,19.5 v2(59.1,18.3) ; 62,11 62.8,11 63.4,11.6 64.5,11.6 v2(65.5,10.6) C15.1@65.5,9.7 ; v2(64.1,20.1) 64.113,20.1 64.513,20.5 C17.1@65.3,20.5 C16.1@65.3,22.5 65.3,23.8
  PWR/DSIG w1: 11.75,33.8 22.5,33.8 25.4,30.9 33.9,30.9 ; 11.9,13.1 14,11 15,11 ; 12.3,18.2 12.979,18.2 15.679,15.5 16,15.5 ; 13.3,25.6 16.879,22.021 16.879,16 ; 30.2,12.3 32.3,12.3 33.1,11.5 ; 30.2,35.3 35.3,35.3 35.4,35.4 ; 30.225,25.4 34.9,25.4 ; 30.3,17.4 33.5,17.4 ; 38.2,7.5 41,7.5 ; 40,28.521 v2(40,30) ; 48.4,22.134 48.4,18.4 51.3,15.5 v2(54.7,15.5) 56.2,14 56.2,11.7 56.9,11 62,11 ; v2(51.2,20) 51.2,21.914 ; 52.7,22.5 55.4,22.5 58.2,19.7 58.9,19.7 ; v2(60.6,29.3) 63.8,29.3 v2(64.1,29) 65.3,27.8 65.3,23.8
  other v2: 40,23 41,23 46,23 47,23 40,24 47,24 40,25 47,25 40,26 47,26 65,28 62.75,29.25 40,31 40,32 40,38 40,39 40,40